# Altium PCB Sound_Level_Monitoring_PCB.PcbDoc
Units mm, origin at the board's own origin, x right, y up, seen from the top; angles counter-clockwise.
Board outline 70.66 x 68.07 mm, 2 copper layers (Top Layer, Bottom Layer); 10 components, 10 nets, 75 pads, 6 vias.
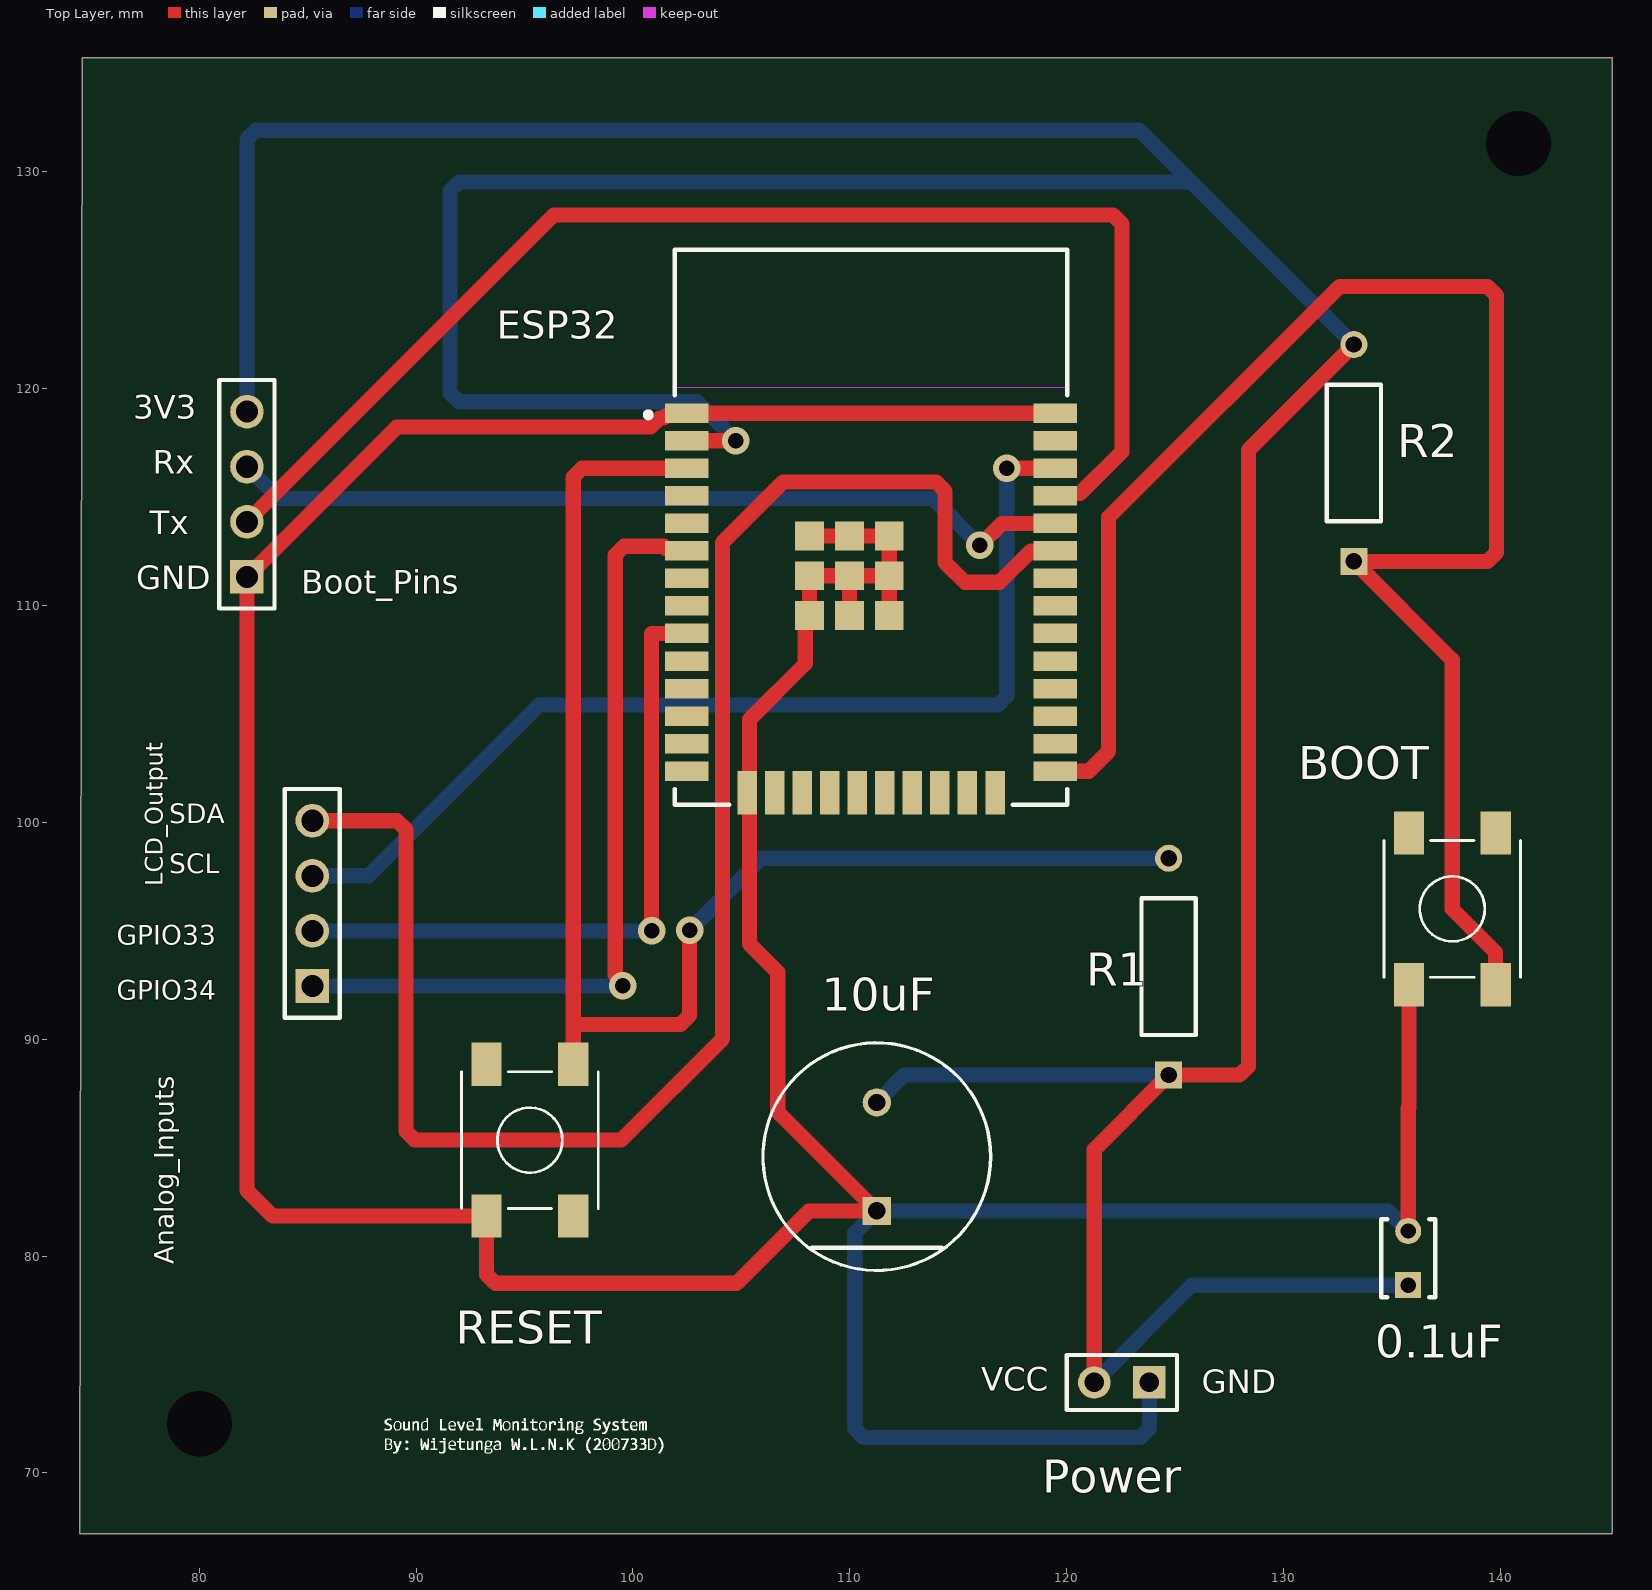
[diagram p0: Top Layer view]
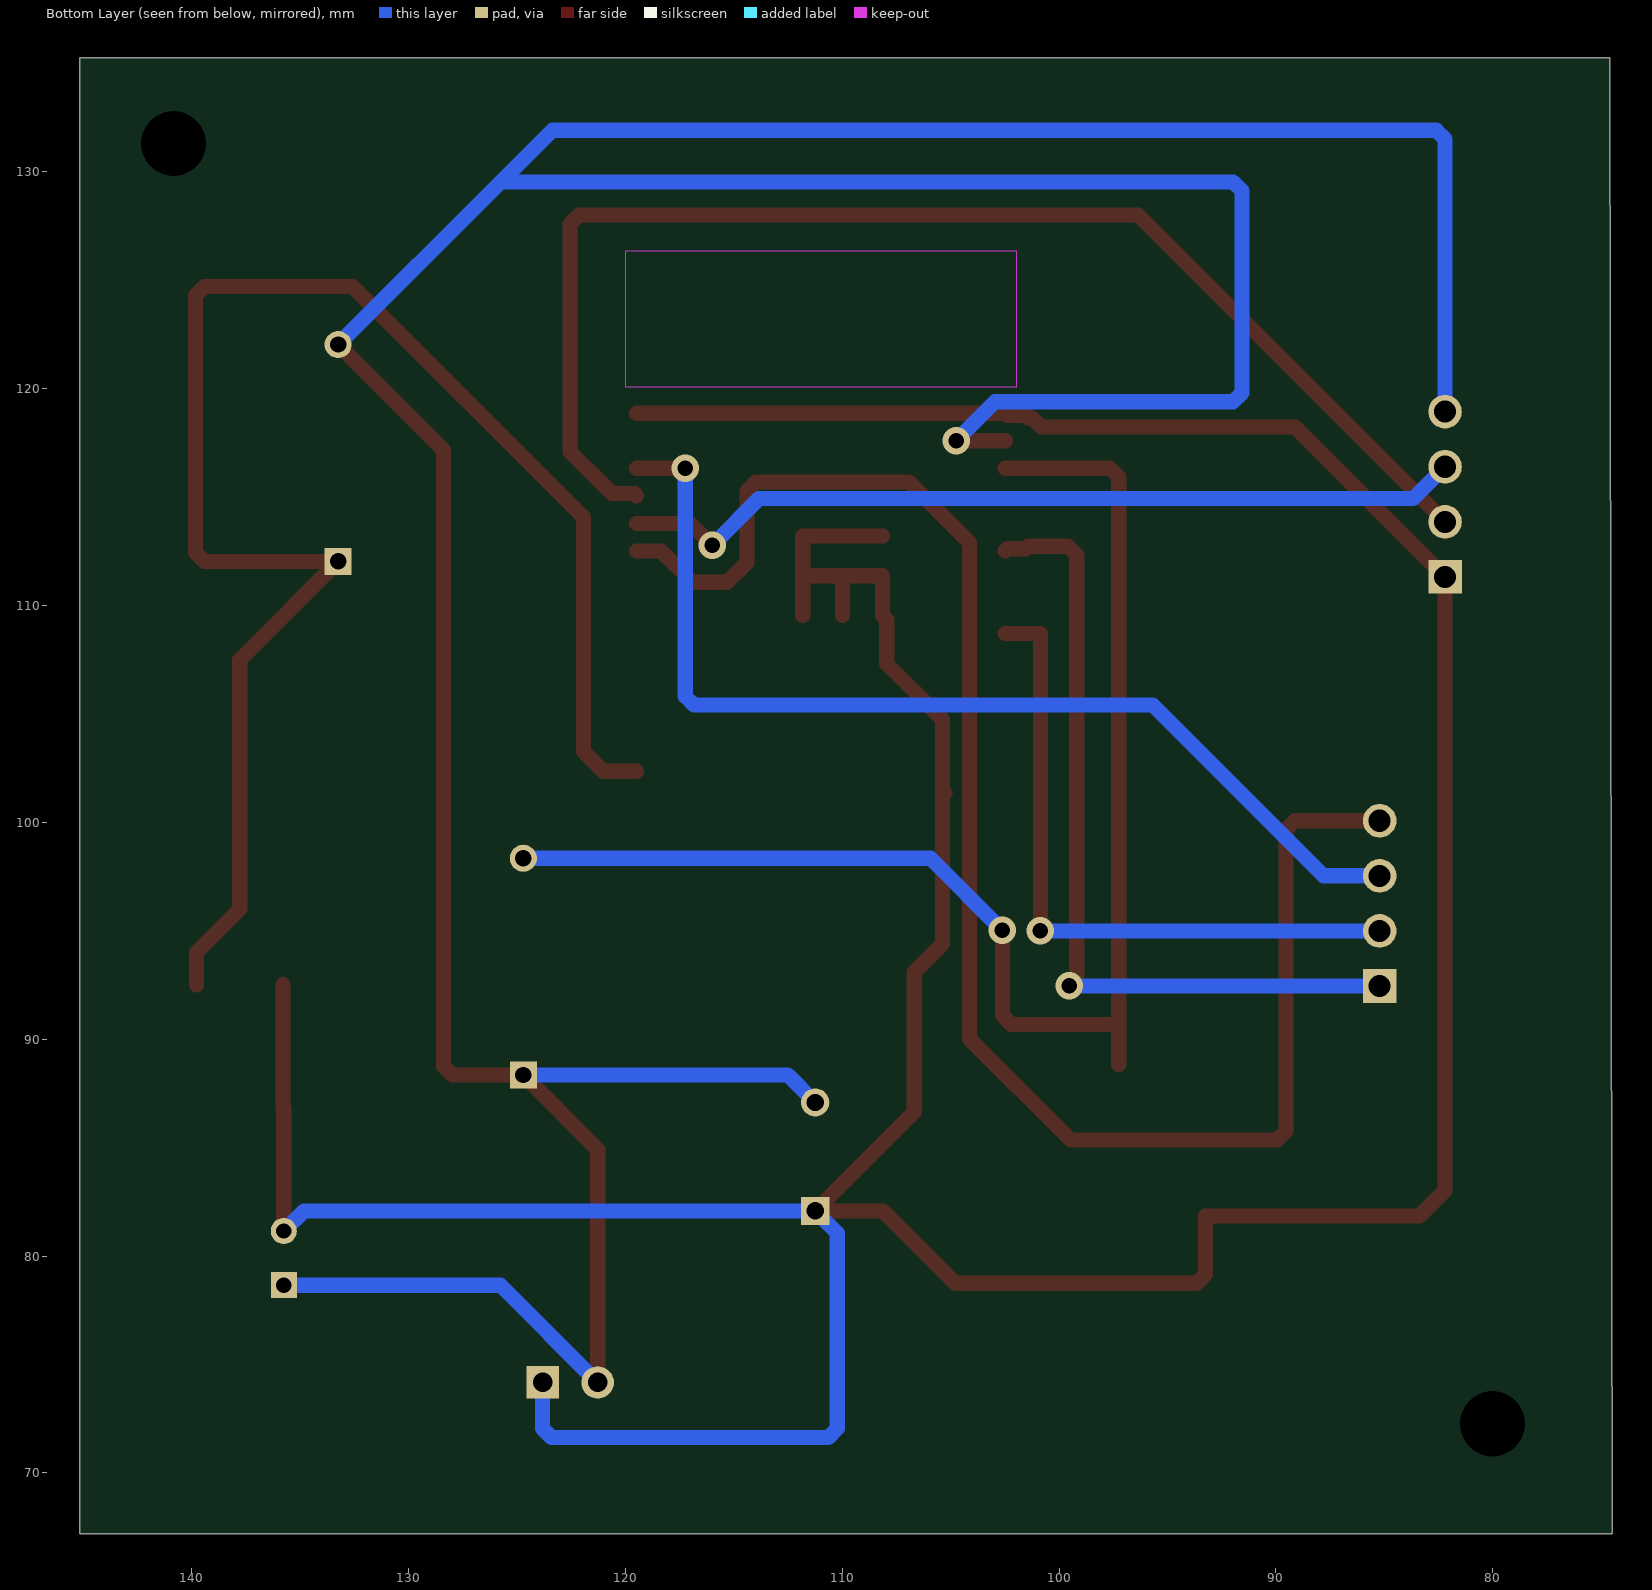
[diagram p1: Bottom Layer view, seen from below]
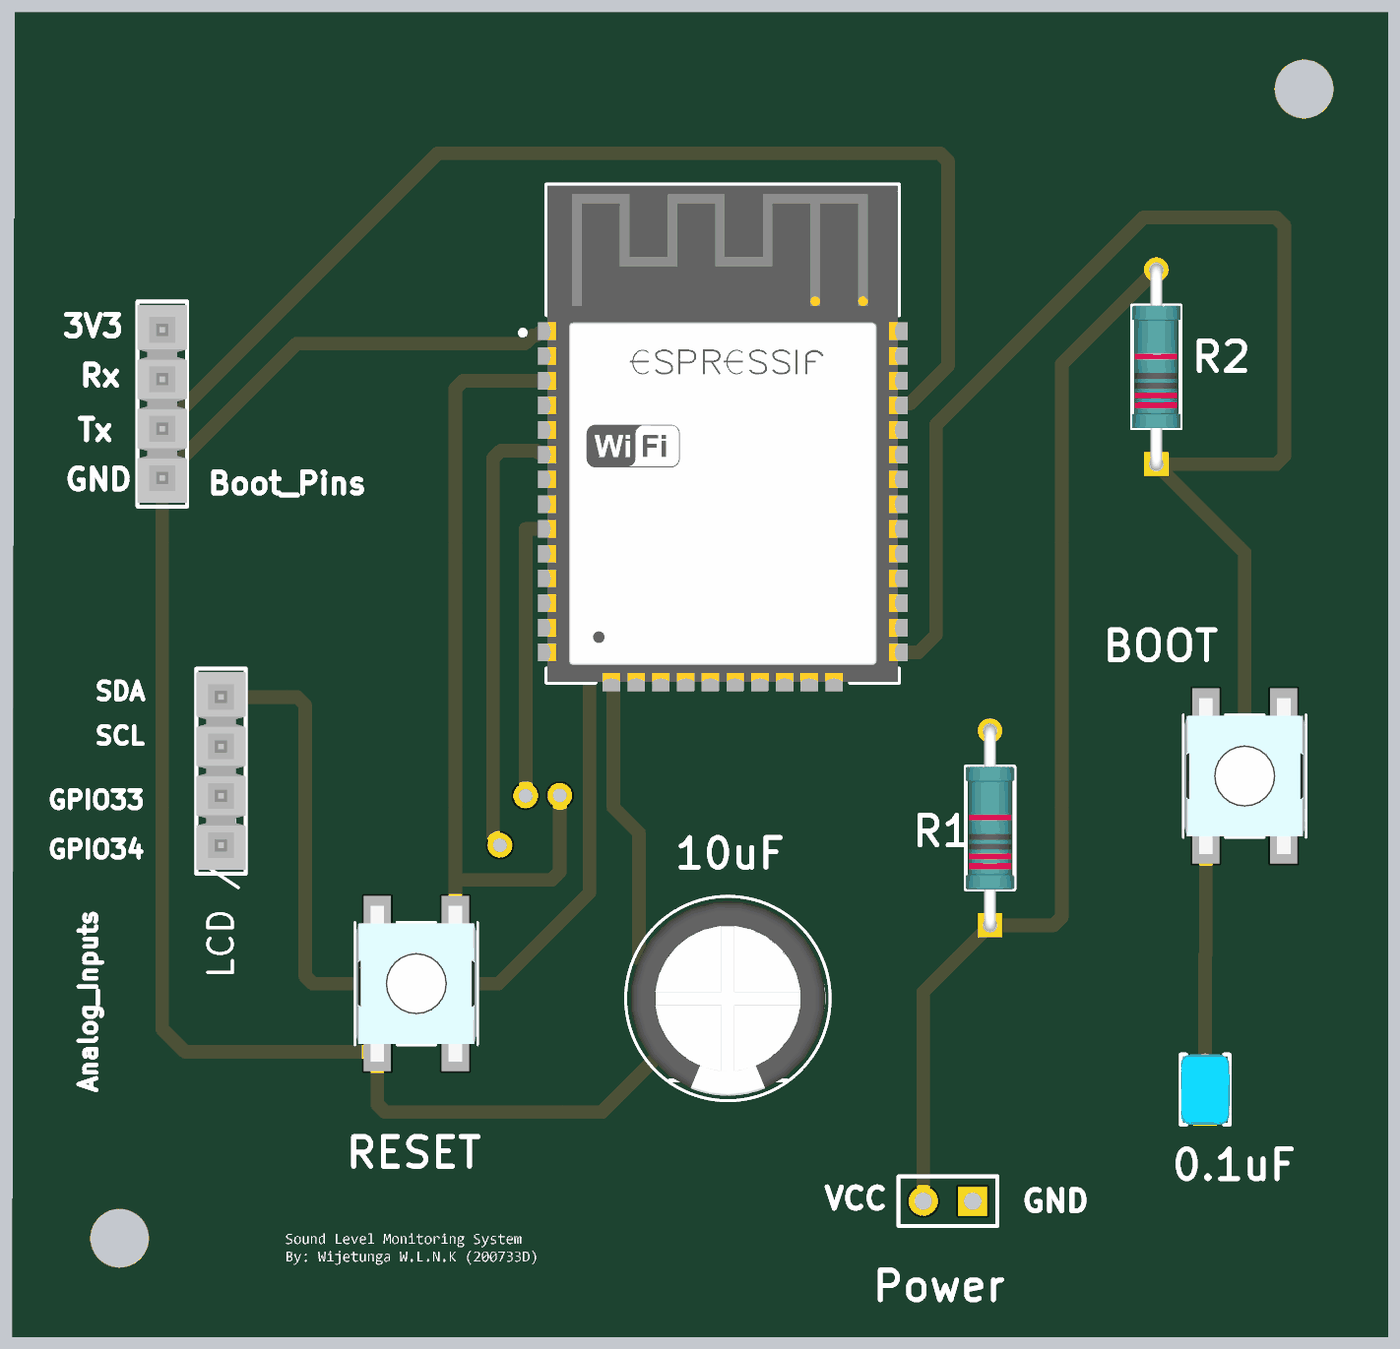
[diagram p2: 3D render of the assembled board from above, using the file's embedded part models]

## Layer stack, top to bottom
Top Solder: solder mask 0.0102, Solder Resist, Dk 3.5
Top Layer: signal copper 0.0356
Dielectric 1: dielectric 0.32, FR-4, Dk 4.8
Bottom Layer: signal copper 0.0356
Bottom Solder: solder mask 0.0102, Solder Resist, Dk 3.5

## Board outline
74.604,135.255 145.161,135.255 145.161,67.183 74.502,67.183

## Design rules (kind name [scope] priority, off if disabled: settings)
Clearance [All] p1: gap=0.254 ignorepadtopadclearanceinfootprint=FALSE except(0: Arc-Hole Track-Hole SMDPad-Hole THPad-Hole Via-Hole Fill-Hole Poly-Hole Region-Hole Text-Hole)
PolygonConnect [All] p1: connectstyle=Relief reliefconductorwidth=0.254 reliefentries=4 polygonreliefangle="90 Angle" airgapwidth=0.254
RoomDefinition Sheet2 [InComponentClass('Sheet2')] p1: confinementstyle=ConfineIn formatcopy=TRUE lockcomponents=FALSE outline 74.549,135.255 74.629,135.132 144.907,135.132 144.907,67.168 144.588,66.675 144.349,67.045 74.709,67.045 74.709,134.762 74.629,134.885
RoutingVias [All] p1: holewidth=0.711 width=1.27 viastyle="Through Hole" minholewidth=0.711 minwidth=1.27 maxholewidth=0.711 maxwidth=1.27
SolderMaskExpansion [All] p1: expansion=0.102 istentingtop=FALSE
Width [All] p1: maxlimit=1.5 minlimit=0.5 preferedwidth=0.7
30 further rules are at their usual default settings.

## Components (designator, comment, footprint, x,y, rotation, side; value= is the part's Value field where it differs from the comment)
0.1uF "C2" FP-RCE0DB-MFG 135.763,79.903 r90 top
10uF "C1" FP-RAD-TH-D_10_0_5-L_16_1-MFG 111.252,84.582 r90 top
BOOT "430471025826" 430471025826 137.795,96.012 r90 top (schematic designator boot)
Boot_Pins "TSW-104-08-L-S" SMTC-TSW-104-08-X-S 82.201,111.323 r90 top (schematic designator boot_pins)
ESP32 "ESP32-WROOM-32D" FP-ESP32-WROOM-32D-MFG 110.989,113.612 r0 top (schematic designator esp32)
LCD_Output "TSW-104-08-L-S" SMTC-TSW-104-08-X-S 85.217,92.456 r90 top (schematic designator "LCD / A_Input")
Power "Header 2" HDR1X2 123.825,74.168 r180 top
R1 "10k" FP-MBB0207-MFG 124.714,93.345 r90 top
R2 "10k" FP-MBB0207-MFG 133.255,117.038 r90 top
RESET "430471025826" 430471025826 95.25,85.344 r90 top

## Footprints (in the part's own frame and the unit in brackets; to place one, negate y for a bottom-side part, rotate by r counter-clockwise, add the part's x,y. Pads: shape width x height; smd on the part's side, far side on the other; paste and mask are expansions set on the pad)
430471025826 [mm] "6*6mm vertical type,SMD, height 2.5mm, white actuator, 260gf, T&R"
  rect 2x1.4 smd: 1(-3.5,2) 2(3.5,2) 3(-3.5,-2) 4(3.5,-2)
  silkscreen extent -3.15,-3.15 3.15,3.15, body extent -4,-3.1 4,3.1, height 2.49
FP-ESP32-WROOM-32D-MFG [mm]
  rect 2x0.9 smd paste+0 mask+0: 1(-8.5,5.26) 2(-8.5,3.99) 3(-8.5,2.72) 4(-8.5,1.45) 5(-8.5,0.18) 6(-8.5,-1.09) 7(-8.5,-2.36) 8(-8.5,-3.63) 9(-8.5,-4.9) 10(-8.5,-6.17) 11(-8.5,-7.44) 12(-8.5,-8.71) 13(-8.5,-9.98) 14(-8.5,-11.25) 25(8.5,-11.25) 26(8.5,-9.98) 27(8.5,-8.71) 28(8.5,-7.44) 29(8.5,-6.17) 30(8.5,-4.9) 31(8.5,-3.63) 32(8.5,-2.36) 33(8.5,-1.09) 34(8.5,0.18) 35(8.5,1.45) 36(8.5,2.72) 37(8.5,3.99) 38(8.5,5.26)
  rect 0.9x2 smd paste+0 mask+0: 15(-5.715,-12.25) 16(-4.445,-12.25) 17(-3.175,-12.25) 18(-1.905,-12.25) 19(-0.635,-12.25) 20(0.635,-12.25) 21(1.905,-12.25) 22(3.175,-12.25) 23(4.445,-12.25) 24(5.715,-12.25)
  rect 1.33x1.33 smd paste+0 mask+0: 39(-2.835,-4.075) 39(-2.835,-2.24) 39(-2.835,-0.405) 39(-1,-4.075) 39(-1,-2.24) 39(-1,-0.405) 39(0.835,-4.075) 39(0.835,-2.24) 39(0.835,-0.405)
  Keep-Out Layer region: -9,6.45 9,6.45 9,12.75 -9,12.75
  Keep-Out Layer region: -9,6.45 9,6.45 9,12.75 -9,12.75
  silkscreen extent -10.4,-12.8 9.05,12.8, body extent -9.6,-13.35 9.6,12.9, height 0.25
FP-MBB0207-MFG [mm]
  rect 1.25x1.25 hole 0.75 paste-1000 mask+0: 1(-5,0)
  round 1.25 hole 0.75 paste-1000 mask+0: 2(5,0)
  silkscreen extent -3.15,-1.25 3.15,1.25, body extent -5.72,-1.35 5.72,1.35, height 0.25
FP-RAD-TH-D_10_0_5-L_16_1-MFG [mm]
  rect 1.3x1.3 hole 0.8 paste-1000 mask+0: 1(-2.5,0)
  round 1.3 hole 0.8 paste-1000 mask+0: 2(2.5,0)
  silkscreen extent -5.25,-5.25 5.25,5.25, body extent -5.35,-5.35 5.35,5.35, height 0.25
FP-RCE0DB-MFG [mm]
  rect 1.2x1.2 hole 0.7 paste-1000 mask+0: 1(-1.25,0)
  round 1.2 hole 0.7 paste-1000 mask+0: 2(1.25,0)
  silkscreen extent -1.8,-1.25 1.8,1.25, body extent -1.95,-1.35 1.95,1.35, height 0.25
HDR1X2 [mm] "Connector; Header; 2 Position"
  rect 1.5x1.5 hole 0.9: 1(0,0)
  round 1.5 hole 0.9: 2(2.54,0)
  silkscreen extent -1.27,-1.27 3.81,1.27
SMTC-TSW-104-08-X-S [mm] ".025 SQ Post Terminal Strip Assembly, 1x4 Pins, Vertical, 2.54mm Pitch, Male"
  rect 1.55x1.55 hole 1.02: 1(0,0)
  round 1.55 hole 1.02: 2(2.54,0) 3(5.08,0) 4(7.62,0)
  silkscreen extent -1.46,-1.27 9.08,1.27, body extent -1.27,-1.27 8.89,1.27, height 8.38

## Part data
0.1uF: library part CMP-06035-048089-1, "Cap Ceramic 100nF 50V X7R ±10% Radial 2.5mm +125°C Ammo Pack", Capacitance=100nF, Case/Package=Radial, Dielectric=X7R, Max Operating Temperature=125°C, Min Operating Temperature=-55°C, Package Quantity=2000, Ratings=AEC-Q200, Resistor Type=Ceramic, Tolerance=10%, Voltage Rating=50V, Height=3.5mm, Height - Seated (Max)=0.138inch, Lead Diameter=0.5mm, Lead Free="Lead Free", Lead Pitch=0.098inch, Lead/Base Style=Straight, Length=0.142inch, Mount="Through Hole", Packaging="Tape and Reel", Termination=Radial, Voltage Rating (DC)=50V, Width=0.098inch
10uF: library part CMP-05427-000979-1, "Aluminum Electrolytic Capacitors (Radial Lead Type) AEC-Q200 Qualified 1000uF ±20% 10V", Capacitance=1mF, Case/Package=Radial, Dielectric Material=Aluminium, ESR (Equivalent Series Resistance)=68mR, Leakage Current=3uA, Max Operating Temperature=105°C, Min Operating Temperature=-55°C, Package Quantity=200, Ratings=AEC-Q200, Ripple Current=1.05A, Tolerance=20%, Voltage=10V, Construction=RADIAL, Contact Plating=Tin, Diameter=10mm, Height=16mm, Height - Seated (Max)=0.63inch, Impedance=68mR, Lead Diameter=0.6mm, Lead Free="Lead Free", Lead Pitch=5mm, Length=16mm, Life (Hours)=3000Hour, Mount="Through Hole", Packaging=Bulk, Radiation Hardening=No, REACH SVHC="No SVHC", RoHS Compliant=Yes, Series=FC, Size=16mm, Termination=Radial, Voltage Rating=10V, Voltage Rating (DC)=10V
BOOT RESET: library part CMP-1452-00022-1, "WS-TASV SMD Tact Switch 6X6 mm", Manufacturer="Wuerth Elektronik", ComponentLink1Description="Manufacturer URL", ComponentLink1URL=http://www.we-online.com, ComponentLink2Description=Datasheet, ComponentLink2URL=http://katalog.we-online.de/em/datasheet/4304x1.pdf, NoPins=04, PackageReference=430471025826, PartNumber=430471025826
Boot_Pins LCD_Output: library part CMP-1024-00358-1, "0.025\" SQ Post Header, Through-hole, Vertical, -55 to 125 degC, 2.54 mm Pitch, 4-Pin, Male, RoHS", Manufacturer=Samtec, Temperature Range="-55 to 125 degC", ComponentLink1Description="Manufacturer URL", ComponentLink1URL=http://www.samtec.com, ComponentLink2Description=Datasheet, ComponentLink2URL=http://www.samtec.com/documents/webfiles/pdf/TSW_TH.PDF, ComponentLink3Description="Package Specification", ComponentLink3URL=http://www.samtec.com/documents/webfiles/cpdf/TSW-XXX-XX-XXX-X-XX-XXX-MKT.pdf, DatasheetVersion=F-214, Mounting Technology=Through-hole, Orientation=Vertical, PackageDescription=".025[0.64] SQ. Post Terminal Strip Assembly", PackageReference=TSW-104-08-X-S, PackageVersion="DM, 8/1988", PartNumber=TSW-104-08-L-S, Pitch="2.54 mm", RoHS=True
ESP32: library part CMP-194065-000003-1, "WIFI MODULE 32MBITS SPI FLASH", Manufacturer="Espressif Systems", Max Frequency=2484MHz, Max Supply Voltage=3.6V, Min Supply Voltage=3V, Nominal Supply Current=500mA, Temperature="-40°C to +85°C", Temperature Range High=+85°C, Temperature Range Low=-40°C, Automotive=No, Bandwidth=72MHz, Category=UNK, ComponentLink2Description=Datasheet, ComponentLink2URL=https://www.espressif.com/sites/default/files/documentation/esp32-wroom-32d_esp32-wroom-32u_datasheet_en.pdf, Data Rate=150Mbits/s, Device Class L1="Integrated Circuits (ICs)", Device Class L2="RF Semiconductors and Devices", Device Class L3=Transceivers, Digikey Description="WIFI MODULE 32MBITS SPI FLASH", Height=3.2mm, Interface=I2C,SPI,UART,Ethernet,I2S,Other, Lead Free=Yes, Manufacturer Part Number=ESP32-WROOM-32D, Mouser Description="Wi-Fi/BT BLE Module ESP32-D0WD, SPI Flash, UART, P", Number Of Adc Channels=16, Number Of Gpio=32, Octopart=https://octopart.com/esp32-wroom-32d-espressif+systems-91040050, Package=ESP32-WROOM-32D, RoHS=TRUE, Sensitivity=-98dBm
Power: library part CMP-307-000070-1, "Header, 2-Pin", Component Type=Standard, Design Item ID="Header 2", LatestRevisionDate=17-Jul-2002, LatestRevisionNote="Re-released for DXP Platform.", Pin Count=2, Publisher="Altium Limited", Source="Miscellaneous Connectors.SchLib"
R1 R2: library part CMP-02408-000035-1, "RES 10K OHM 0.6W 1% AXIAL", Case/Package=Conformal, Max Operating Temperature=155°C, Max Power Dissipation=600mW, Min Operating Temperature=-55°C, Resistance=10kR, Resistance Tolerance=1%, Resistor Type="Metal Film", Temperature Coefficient=50ppm/°C, Voltage Rating=300V, Construction=Cylindrical, Contact Plating=Tin, Diameter=2.5mm, Features="Automotive AEC-Q200", Lead Free="Lead Free", Length=6.5mm, Military Standard=Not, Number of Terminations=2, Packaging="Tape and Reel", Power Rating=600mW, Radiation Hardening=No, RoHS Compliant=Yes, Series="MBB 0207 - Professional", Technology="THIN FILM", Termination=Axial, Tolerance=1%, Voltage Rating (DC)=300V

## Free pads (board coordinates)
  round 1.524 hole 3: 1(80.01,72.263) 2(140.843,131.318)

## Via types
v1: diameter 1.27, hole 0.711, Top Layer to Bottom Layer, 6 vias

## Nets (pads, with @x,y where several pads share a name; then routed paths per layer and width w, separated by ;. In a path a pad name is that pad's centre, name@x,y a point inside that pad or via, vN(x,y) a via of type N, cw(c..) or ccw(c..) an arc to the next point about the centre after c; other vN are vias at no path point)
Net0.1uF_1: 0.1uF.1 10uF.2 Boot_Pins.4 ESP32.2 Power.2 R1.1 R2.2 | length 213
  Top Layer w0.7: ESP32.2 v1(104.75,117.602) ; Power.2 121.285,84.916 R1.1 127.987,88.345 128.397,88.755 128.397,117.18 R2.2
  Bottom Layer w0.7: Boot_Pins.4 82.201,131.511 82.611,131.921 123.372,131.921 125.753,129.54 ; v1(104.75,117.602) 102.952,119.4 91.977,119.4 91.567,119.81 91.567,129.13 91.977,129.54 125.753,129.54 ; 10uF.2 112.515,88.345 R1.1 ; Power.2 125.77,78.653 0.1uF.1 ; R2.2 125.753,129.54
Net0.1uF_2: 0.1uF.2 10uF.1 BOOT.1 Boot_Pins.1 ESP32.1 ESP32.15 ESP32.38 ESP32.39 Power.1 RESET.1 | length 211.1
  Top Layer w0.7: ESP32.39@108.154,113.207 109.989,113.207 111.824,113.207 ESP32.39@111.824,111.372 ; ESP32.39@109.989,109.537 ESP32.39@109.989,111.372 ; ESP32.39@111.824,109.537 ESP32.39@111.824,111.372 ; ESP32.38 ESP32.1 102.389,118.772 101.545,118.772 101.429,118.656 101.239,118.656 100.82,118.237 89.115,118.237 Boot_Pins.1 82.201,83.026 83.383,81.844 RESET.1 93.25,79.15 93.66,78.74 104.775,78.74 108.117,82.082 10uF.1 106.68,86.654 106.68,93.091 105.374,94.397 105.374,101.262 ESP32.15 105.374,101.462 105.374,104.739 107.95,107.315 107.95,109.333 108.154,109.537 108.154,111.372 ESP32.39@109.989,111.372 ; 0.1uF.2 135.763,86.817 135.795,86.849 BOOT.1 ; ESP32.39@109.989,111.372 ESP32.39@111.824,111.372
  Bottom Layer w0.7: Power.1 123.825,72.038 123.415,71.628 110.646,71.628 110.236,72.038 110.236,81.066 10uF.1 134.834,82.082 0.1uF.2
Netboot_3: BOOT.3 ESP32.25 R2.1 | length 76.9
  Top Layer w0.7: ESP32.25 121.031,102.362 121.945,103.276 121.945,114.071 132.588,124.714 139.417,124.714 139.827,124.304 139.827,112.448 139.417,112.038 R2.1 137.795,107.498 137.795,96.012 139.795,94.012 BOOT.3
Netboot_pins_2: Boot_Pins.2 ESP32.35 | length 60.8
  Top Layer w0.7: Boot_Pins.2 96.354,128.016 122.145,128.016 122.555,127.606 122.555,117.094 120.623,115.162 119.589,115.162 ESP32.35
Netboot_pins_3: Boot_Pins.3 ESP32.34 | length 39.2
  Top Layer w0.7: v1(116.002,112.776) 117.018,113.792 ESP32.34
  Bottom Layer w0.7: Boot_Pins.3 83.669,114.935 113.843,114.935 v1(116.002,112.776)
Netesp32_3: ESP32.3 R1.2 RESET.4 | length 65.4
  Top Layer w0.7: RESET.4 97.25,90.678 ; ESP32.3 97.66,116.332 97.25,115.922 97.25,90.678 ; v1(102.616,95.021) 102.616,91.088 102.206,90.678 97.25,90.678
  Bottom Layer w0.7: v1(102.616,95.021) 105.94,98.345 R1.2
Netesp32_6: ESP32.6 LCD_Output.1 | length 37.9
  Top Layer w0.7: v1(99.543,92.456) 99.543,92.61 99.187,92.966 99.187,112.328 99.597,112.738 101.429,112.738 101.545,112.622 102.389,112.622 ESP32.6
  Bottom Layer w0.7: LCD_Output.1 v1(99.543,92.456)
Netesp32_9: ESP32.9 LCD_Output.2 | length 31
  Top Layer w0.7: v1(100.863,94.996) 100.863,108.712 ESP32.9
  Bottom Layer w0.7: LCD_Output.2 v1(100.863,94.996)
Netesp32_33: ESP32.33 LCD_Output.4 | length 78.9
  Top Layer w0.7: LCD_Output.4 89.125,100.076 89.535,99.666 89.535,85.754 89.945,85.344 99.466,85.344 104.14,90.018 104.14,112.903 106.934,115.697 113.992,115.697 114.402,115.287 114.402,111.989 115.316,111.074 116.916,111.074 118.364,112.522 ESP32.33
Netesp32_36: ESP32.36 LCD_Output.3 | length 48.2
  Top Layer w0.7: v1(117.246,116.332) ESP32.36
  Bottom Layer w0.7: LCD_Output.3 87.808,97.536 95.682,105.41 116.836,105.41 117.246,105.82 v1(117.246,116.332)
pads on no net: BOOT.2 BOOT.4 ESP32.4 ESP32.5 ESP32.7 ESP32.8 ESP32.10 ESP32.11 ESP32.12 ESP32.13 ESP32.14 ESP32.16 ESP32.17 ESP32.18 ESP32.19 ESP32.20 ESP32.21 ESP32.22 ESP32.23 ESP32.24 ESP32.26 ESP32.27 ESP32.28 ESP32.29 ESP32.30 ESP32.31 ESP32.32 ESP32.37 RESET.2 RESET.3

## Silkscreen, mask and mechanical layers (free items; w line width, h text height)
Top Overlay:
  drawing of 59 lines, arcs and shapes, not listed
  text "3V3" at 76.962,118.618 h1.1
  text "Rx" at 77.851,116.078 h1.1
  text "Tx" at 77.724,113.284 h1.1
  text "GND" at 77.089,110.744 h1.1
  text "SDA" at 78.613,99.949 h0.9
  text "SCL" at 78.613,97.663 h0.9
  text "GPIO33" at 76.2,94.361 h0.9
  text "GPIO34" at 76.2,91.821 h0.9
  text "Analog_Inputs" at 78.821,79.629 h0.9 r90
  text "VCC" at 116.078,73.787 h1.1
  text "GND" at 126.238,73.66 h1.1